# EAGLE board CT_schematic (EAGLE 7.6.0)

Size 100 x 80 mm. Coordinates in mm from the lower left corner, seen from the top.
Outline: 0,0 100,0 100,80 0,80 0,0
Copper layers (1*16): Top 0.035mm / dielectric 1.5mm / Bottom 0.035mm
Design rules "default": minimum track width 10mil, minimum drill 24mil, track to track 8mil, track to pad 8mil, pad to pad 8mil, via to via 8mil, smd to smd 8mil, copper to edge 40mil, drill to drill 8mil, minimum pad ring 10mil, minimum via ring 8mil, stop-mask expansion 4mil, vias tented up to drill 0mil, thermal gap 10mil

## Footprints (pad centres in the part's own frame; a part is rotated, then mirrored left to right if it is on the bottom)
C0603 = smd 0.8 x 0.8: 1 -0.762,0; 2 0.762,0
C0402 = smd 0.5 x 0.5: 1 -0.508,0; 2 0.508,0
C1206 = smd 1.3 x 1.6: 1 -1.524,0; 2 1.524,0
C1210 = smd 1.2 x 2.5: 1 -1.524,0; 2 1.524,0
EXV-9H = smd 3.505 x 1.676: 1 -2.857,0; 2 2.857,0
L0603 = smd 0.8 x 0.8: 1 -0.762,0; 2 0.762,0
L1210 = smd 1.2 x 2.5: 1 -1.524,0; 2 1.524,0
PJ-037B_PACKAGE = drill 3.7 square: 1 12,0 | drill 3.2 square: 2 6,0
R0603 = smd 0.8 x 0.8: 1 -0.762,0; 2 0.762,0
LQFP64 = smd 0.3 x 1.2: 1 -3.75,-5.75; 2 -3.25,-5.75; 3 -2.75,-5.75; 4 -2.25,-5.75; 5 -1.75,-5.75; 6 -1.25,-5.75; 7 -0.75,-5.75; 8 -0.25,-5.75; 9 0.25,-5.75; 10 0.75,-5.75; 11 1.25,-5.75; 12 1.75,-5.75; 13 2.25,-5.75; 14 2.75,-5.75; 15 3.25,-5.75; 16 3.75,-5.75; 33 3.75,5.75; 34 3.25,5.75; 35 2.75,5.75; 36 2.25,5.75; 37 1.75,5.75; 38 1.25,5.75; 39 0.75,5.75; 40 0.25,5.75; 41 -0.25,5.75; 42 -0.75,5.75; 43 -1.25,5.75; 44 -1.75,5.75; 45 -2.25,5.75; 46 -2.75,5.75; 47 -3.25,5.75; 48 -3.75,5.75 | smd 1.2 x 0.3: 17 5.75,-3.75; 18 5.75,-3.25; 19 5.75,-2.75; 20 5.75,-2.25; 21 5.75,-1.75; 22 5.75,-1.25; 23 5.75,-0.75; 24 5.75,-0.25; 25 5.75,0.25; 26 5.75,0.75; 27 5.75,1.25; 28 5.75,1.75; 29 5.75,2.25; 30 5.75,2.75; 31 5.75,3.25; 32 5.75,3.75; 49 -5.75,3.75; 50 -5.75,3.25; 51 -5.75,2.75; 52 -5.75,2.25; 53 -5.75,1.75; 54 -5.75,1.25; 55 -5.75,0.75; 56 -5.75,0.25; 57 -5.75,-0.25; 58 -5.75,-0.75; 59 -5.75,-1.25; 60 -5.75,-1.75; 61 -5.75,-2.25; 62 -5.75,-2.75; 63 -5.75,-3.25; 64 -5.75,-3.75
SOIC-8 = smd 1.6 x 0.6: 1 -2.7,1.905 | smd 1.55 x 0.6: 2 -2.7,0.635; 3 -2.7,-0.635; 4 -2.7,-1.905; 5 2.7,-1.905; 6 2.7,-0.635; 7 2.7,0.635; 8 2.7,1.905
SAMTEC_FTSH-105-01-L-DV-K = smd 0.762 x 2.794: 1 -2.54,-2.032; 2 -2.54,2.032; 3 -1.27,-2.032; 4 -1.27,2.032; 5 0,-2.032; 6 0,2.032; 7 1.27,-2.032; 8 1.27,2.032; 9 2.54,-2.032; 10 2.54,2.032
LGA-16 = smd 1.5 x 0.4: 1 -2.1,0.975; 2 -2.1,0.325; 3 -2.1,-0.325; 4 -2.1,-0.975; 9 2.1,-0.975; 10 2.1,-0.325; 11 2.1,0.325; 12 2.1,0.975 | smd 0.4 x 1.5: 5 -0.975,-2.1; 6 -0.325,-2.1; 7 0.325,-2.1; 8 0.975,-2.1; 13 0.975,2.1; 14 0.325,2.1; 15 -0.325,2.1; 16 -0.975,2.1
SSOP-16 = smd 1.981 x 0.356: 1 -2.464,2.223; 2 -2.464,1.587; 3 -2.464,0.953; 4 -2.464,0.318; 5 -2.464,-0.318; 6 -2.464,-0.953; 7 -2.464,-1.587; 8 -2.464,-2.223; 9 2.464,-2.223; 10 2.464,-1.587; 11 2.464,-0.953; 12 2.464,-0.318; 13 2.464,0.318; 14 2.464,0.953; 15 2.464,1.587; 16 2.464,2.223
HTSS-105-01-G-D = drill 1 pad 1.8 square: 1 0,0 | drill 1 pad 1.8: 2 0,2.54; 3 2.54,0; 4 2.54,2.54; 5 5.08,0; 6 5.08,2.54; 7 7.62,0; 8 7.62,2.54; 9 10.16,0; 10 10.16,2.54
ABS07-32.768KHZ-7-T = smd 1.1 x 2.4: 1 -2.5,0; 2 0,0
ABLS-25.000MHZ-B2F-T = smd 5.6 x 2.8: 1 -3.81,0; 2 5.69,0
WSON-8 = smd 0.3 x 0.6: 1 -0.75,0; 2 0.05,0; 3 0.85,0; 4 1.65,0; 5 1.65,3.8; 6 0.85,3.8; 7 0.05,3.8; 8 -0.75,3.8 | smd 3 x 2.6: PAD 0.45,1.9
SON-6 = smd 0.55 x 0.3: 1 -0.355,0.5 | smd 0.52 x 0.3: 2 -0.37,0; 3 -0.37,-0.5; 4 0.37,-0.5; 5 0.37,0; 6 0.37,0.5
SW_4-1437565-2 = smd 1.4 x 2.1: 1 -2.23,4.55; 2 -2.23,-4.55; 3 2.23,4.55; 4 2.23,-4.55
LGM67K-G1J2-24-Z = smd 0.8 x 1.4: A -2,0; C 0,0
NC7SZ125M5X = smd 1.3 x 0.7: 1 -1.3,0.95; 2 -1.3,0; 3 -1.3,-0.95; 4 1.3,-0.95; 5 1.3,0.95

## Placement (x,y rotation side)
C1  1e-06  [C0603]  -66.04,62.23 0 top  (outside the outline)
C2  1e-07  [C0603]  -69.85,62.23 0 top  (outside the outline)
C3  1e-07  [C0603]  -15.24,67.31 0 top  (outside the outline)
C4  1e-07  [C0603]  -19.05,67.31 0 top  (outside the outline)
C5  1e-07  [C0603]  -22.86,67.31 0 top  (outside the outline)
C6  1e-07  [C0603]  -26.67,67.31 0 top  (outside the outline)
C7  1e-07  [C0603]  -30.48,67.31 0 top  (outside the outline)
C8  4.7e-06  [C0603]  -54.61,62.23 0 top  (outside the outline)
C9  1e-08  [C0603]  -34.29,67.31 0 top  (outside the outline)
C10  1e-06  [C0603]  -38.1,67.31 0 top  (outside the outline)
C11  1e-11  [C0402]  -22.86,72.39 0 top  (outside the outline)
C12  1e-11  [C0402]  -26.67,72.39 0 top  (outside the outline)
C13  1e-11  [C0402]  -30.48,72.39 0 top  (outside the outline)
C14  1e-11  [C0402]  -34.29,72.39 0 top  (outside the outline)
C15  1e-08  [C0402]  -38.1,72.39 0 top  (outside the outline)
C16  1e-07  [C0402]  -41.91,72.39 0 top  (outside the outline)
C17  1e-08  [C0402]  -45.72,72.39 0 top  (outside the outline)
C18  1e-08  [C0402]  -49.53,72.39 0 top  (outside the outline)
C19  1e-08  [C0402]  -53.34,72.39 0 top  (outside the outline)
C20  4.7e-07  [C0603]  -58.42,62.23 0 top  (outside the outline)
C21  1e-06  [C0603]  -41.91,67.31 0 top  (outside the outline)
C22  1e-06  [C0603]  -45.72,67.31 0 top  (outside the outline)
C23  2.2e-07  [C0603]  -62.23,62.23 0 top  (outside the outline)
C24  1e-06  [C0603]  -49.53,67.31 0 top  (outside the outline)
C25  1e-06  [C0603]  -53.34,67.31 0 top  (outside the outline)
C26  1e-08  [C0402]  -57.15,72.39 0 top  (outside the outline)
C27  1e-05  [C1206]  -67.31,48.26 0 top  (outside the outline)
C28  1e-05  [C1210]  -54.61,49.53 0 top  (outside the outline)
C29  1e-07  [C0402]  -60.96,72.39 0 top  (outside the outline)
C30  0.0001  [EXV-9H]  -17.78,41.91 0 top  (outside the outline)
C31  0.0001  [EXV-9H]  -29.21,41.91 0 top  (outside the outline)
C32  1e-08  [C0402]  -64.77,72.39 0 top  (outside the outline)
C33  1e-08  [C0402]  -68.58,72.39 0 top  (outside the outline)
F1  240.0  [L0603]  -57.15,67.31 0 top  (outside the outline)
I1  1e-05  [L1210]  -60.96,49.53 0 top  (outside the outline)
J1  PJ-037B  [PJ-037B_PACKAGE]  -57.15,7.62 0 top  (outside the outline)
R2  1000.0  [R0603]  -60.96,67.31 0 top  (outside the outline)
R4  4700.0  [R0603]  -64.77,67.31 0 top  (outside the outline)
R5  10000.0  [R0603]  -48.26,55.88 0 top  (outside the outline)
R6  10000.0  [R0603]  -53.34,55.88 0 top  (outside the outline)
R7  10000.0  [R0603]  -58.42,55.88 0 top  (outside the outline)
R8  10000.0  [R0603]  -63.5,55.88 0 top  (outside the outline)
R9  10000.0  [R0603]  -68.58,55.88 0 top  (outside the outline)
R10  10000.0  [R0603]  -15.24,62.23 0 top  (outside the outline)
R11  10000.0  [R0603]  -20.32,62.23 0 top  (outside the outline)
R12  10000.0  [R0603]  -25.4,62.23 0 top  (outside the outline)
R13  5.0  [R0603]  -68.58,67.31 0 top  (outside the outline)
R14  10000.0  [R0603]  -30.48,62.23 0 top  (outside the outline)
R15  10000.0  [R0603]  -35.56,62.23 0 top  (outside the outline)
R16  100000.0  [R0603]  -27.94,55.88 0 top  (outside the outline)
R17  100000.0  [R0603]  -33.02,55.88 0 top  (outside the outline)
R18  1500.0  [R0603]  -15.24,72.39 0 top  (outside the outline)
R19  1000.0  [R0603]  -19.05,72.39 0 top  (outside the outline)
R20  10000.0  [R0603]  -40.64,62.23 0 top  (outside the outline)
R21  10000.0  [R0603]  -45.72,62.23 0 top  (outside the outline)
R22  18000.0  [R0603]  -50.8,62.23 0 top  (outside the outline)
R23  470000.0  [R0603]  -38.1,55.88 0 top  (outside the outline)
R24  120000.0  [R0603]  -43.18,55.88 0 top  (outside the outline)
U1  stm32f105r8t7  [LQFP64]  -22.86,21.59 0 top  (outside the outline)
U2  AT25512N-SH-T  [SOIC-8]  -41.91,33.02 0 top  (outside the outline)
U3  FTSH-105-01-L-DV-K  [SAMTEC_FTSH-105-01-L-DV-K]  -35.56,7.62 0 top  (outside the outline)
U4  l3g4200d  [LGA-16]  -35.56,49.53 0 top  (outside the outline)
U5  LTC2804CGN-1#PBF  [SSOP-16]  -64.77,20.32 0 top  (outside the outline)
U6  HTSS-105-01-G-D  [HTSS-105-01-G-D]  -27.94,31.75 0 top  (outside the outline)
U7  ABS07-32.768KHZ-7-T  [ABS07-32.768KHZ-7-T]  -27.94,49.53 0 top  (outside the outline)
U8  ABLS-25.000MHZ-B2F-T  [ABLS-25.000MHZ-B2F-T]  -48.26,41.91 0 top  (outside the outline)
U9  LP3878SDX-ADJ/NOPB  [WSON-8]  -63.5,31.75 0 top  (outside the outline)
U10  TPS3895ADRYR  [SON-6]  -13.97,76.2 0 top  (outside the outline)
U11  4-1437565-2  [SW_4-1437565-2]  -44.45,20.32 0 top  (outside the outline)
U12  Q65110A2395  [LGM67K-G1J2-24-Z]  -43.18,49.53 0 top  (outside the outline)
U13  nc7sz125m5x  [NC7SZ125M5X]  -15.24,55.88 0 top  (outside the outline)
U14  nc7sz125m5x  [NC7SZ125M5X]  -21.59,55.88 0 top  (outside the outline)

## Library data of the parts
C1-C33 F1 I1 J1 R2 R4-R24 U1-U14 = circuit_tree

## Nets
CLK_CRYSTAL_U1_3: C11.1 U1.3 U7.1
CLK_CRYSTAL_U1_4: C12.1 U1.4 U7.2
CLK_CRYSTAL_U1_5: C13.1 U1.5 U8.1
CLK_CRYSTAL_U1_6: C14.1 U1.6 U8.2
GND: C1.2 C2.2 C3.2 C4.2 C5.2 C6.2 C7.2 C8.2 C9.2 C10.2 C11.2 C12.2 C13.2 C14.2 C15.2 C16.2 C17.2 C18.2 C19.2 C21.2 C22.2 C24.2 C25.2 C26.2 C27.2 C28.2 C29.2 C30.2 C31.2 C32.2 C33.2 J1.2 R2.2 R5.2 R12.2 R13.2 R14.1 R14.2 R19.2 R22.2 R24.2 U1.12 U1.18 U1.31 U1.47 U1.63 U2.4 U3.3 U3.5 U4.8 U4.9 U4.10 U4.11 U4.12 U4.13 U5.8 U6.9 U9.3 U9.PAD U10.2 U12.C U13.2 U13.3 U14.1 U14.3
NET_U1_7: R4.1 U1.7 U14.4
NET_U1_13: C9.1 C10.1 F1.1 U1.13
NET_U1_60: R5.1 U1.60
NET_U1_61: U12.A
NET_U1_62: U11.3 U11.4
NET_U2_3: R6.1 U2.3
NET_U2_7: R8.1 U2.7
NET_U3_2: R11.1 U3.2
NET_U3_4: R12.1 U3.4
NET_U3_9: R13.1 U3.9
NET_U4_14: C19.1 C20.1 U4.14
NET_U4_ATNET_1: C20.2
NET_U5_6: C21.1 U5.6
NET_U5_7: C23.1 I1.2 U5.7
NET_U5_9: C22.1 U5.9
NET_U5_10: C23.2 U5.10
NET_U5_11: R16.1 U5.11
NET_U6_3: U5.1 U6.3
NET_U6_4: U5.2 U6.4
NET_U6_5: U5.3 U6.5
NET_U6_6: U5.4 U6.6
NET_U9_1: C26.1 U9.1
NET_U9_6: R18.2 R19.1 U9.6
NET_U9_8: R17.1 U9.8
NET_U10_1: R21.1 R22.1 U10.1
NET_U10_3: R23.2 R24.1 U10.3
NET_U10_4: R20.1 U10.4 U13.4 U14.2
NET_U11_1: R2.1 U11.1 U11.2
PROC_SPI1_MISO: U1.22 U4.4
PROC_SPI1_MOSI: U1.23 U4.3
PROC_SPI1_NSS: R15.1 U1.20 U4.5
PROC_SPI1_SCK: U1.21 U4.2
PROC_SPI2_MISO: U1.35 U2.2
PROC_SPI2_MOSI: U1.36 U2.5
PROC_SPI2_NSS: R7.1 U1.33 U2.1
PROC_SPI2_SCK: U1.34 U2.6
PROC_SYS_JTDI: R10.1 U1.50 U3.8
PROC_SYS_JTDO: U1.55 U3.6
PROC_UART4_RX: U1.52 U5.16
PROC_UART4_TX: U1.51 U5.14
RST_OUT_U3_JTAG_RST_B: R9.1 U3.10 U13.1
VCC_S1_5V8: C27.1 C30.1 C31.1 J1.1 R17.2 U9.4
VCC_TIER1_2V5: C1.1 C2.1 C3.1 C4.1 C5.1 C6.1 C7.1 C8.1 C15.1 C16.1 C17.1 C18.1 C24.1 C25.1 C28.1 C29.1 C32.1 C33.1 F1.2 I1.1 R4.2 R6.2 R7.2 R8.2 R9.2 R10.2 R11.2 R15.2 R16.2 R18.1 R20.2 R21.2 R23.1 U1.1 U1.19 U1.32 U1.48 U1.64 U2.8 U3.1 U4.1 U4.15 U4.16 U5.5 U5.12 U9.5 U10.6 U13.5 U14.5

## Tracks (layer width: path | path; a pad name or v marks a point on that pad's centre or on a via)
CLK_CRYSTAL_U1_3  (2 unrouted)
CLK_CRYSTAL_U1_4  (2 unrouted)
CLK_CRYSTAL_U1_5  (2 unrouted)
CLK_CRYSTAL_U1_6  (2 unrouted)
GND  (64 unrouted)
NET_U1_7  (2 unrouted)
NET_U1_13  (3 unrouted)
NET_U1_60  (1 unrouted)
NET_U1_62  (1 unrouted)
NET_U2_3  (1 unrouted)
NET_U2_7  (1 unrouted)
NET_U3_2  (1 unrouted)
NET_U3_4  (1 unrouted)
NET_U3_9  (1 unrouted)
NET_U4_14  (2 unrouted)
NET_U5_6  (1 unrouted)
NET_U5_7  (2 unrouted)
NET_U5_9  (1 unrouted)
NET_U5_10  (1 unrouted)
NET_U5_11  (1 unrouted)
NET_U6_3  (1 unrouted)
NET_U6_4  (1 unrouted)
NET_U6_5  (1 unrouted)
NET_U6_6  (1 unrouted)
NET_U9_1  (1 unrouted)
NET_U9_6  (2 unrouted)
NET_U9_8  (1 unrouted)
NET_U10_1  (2 unrouted)
NET_U10_3  (2 unrouted)
NET_U10_4  (3 unrouted)
NET_U11_1  (2 unrouted)
PROC_SPI1_MISO  (1 unrouted)
PROC_SPI1_MOSI  (1 unrouted)
PROC_SPI1_NSS  (2 unrouted)
PROC_SPI1_SCK  (1 unrouted)
PROC_SPI2_MISO  (1 unrouted)
PROC_SPI2_MOSI  (1 unrouted)
PROC_SPI2_NSS  (2 unrouted)
PROC_SPI2_SCK  (1 unrouted)
PROC_SYS_JTDI  (2 unrouted)
PROC_SYS_JTDO  (1 unrouted)
PROC_UART4_RX  (1 unrouted)
PROC_UART4_TX  (1 unrouted)
RST_OUT_U3_JTAG_RST_B  (2 unrouted)
VCC_S1_5V8  (5 unrouted)
VCC_TIER1_2V5  (48 unrouted)